# EAGLE board schematic_v0 (EAGLE 9.7.0)
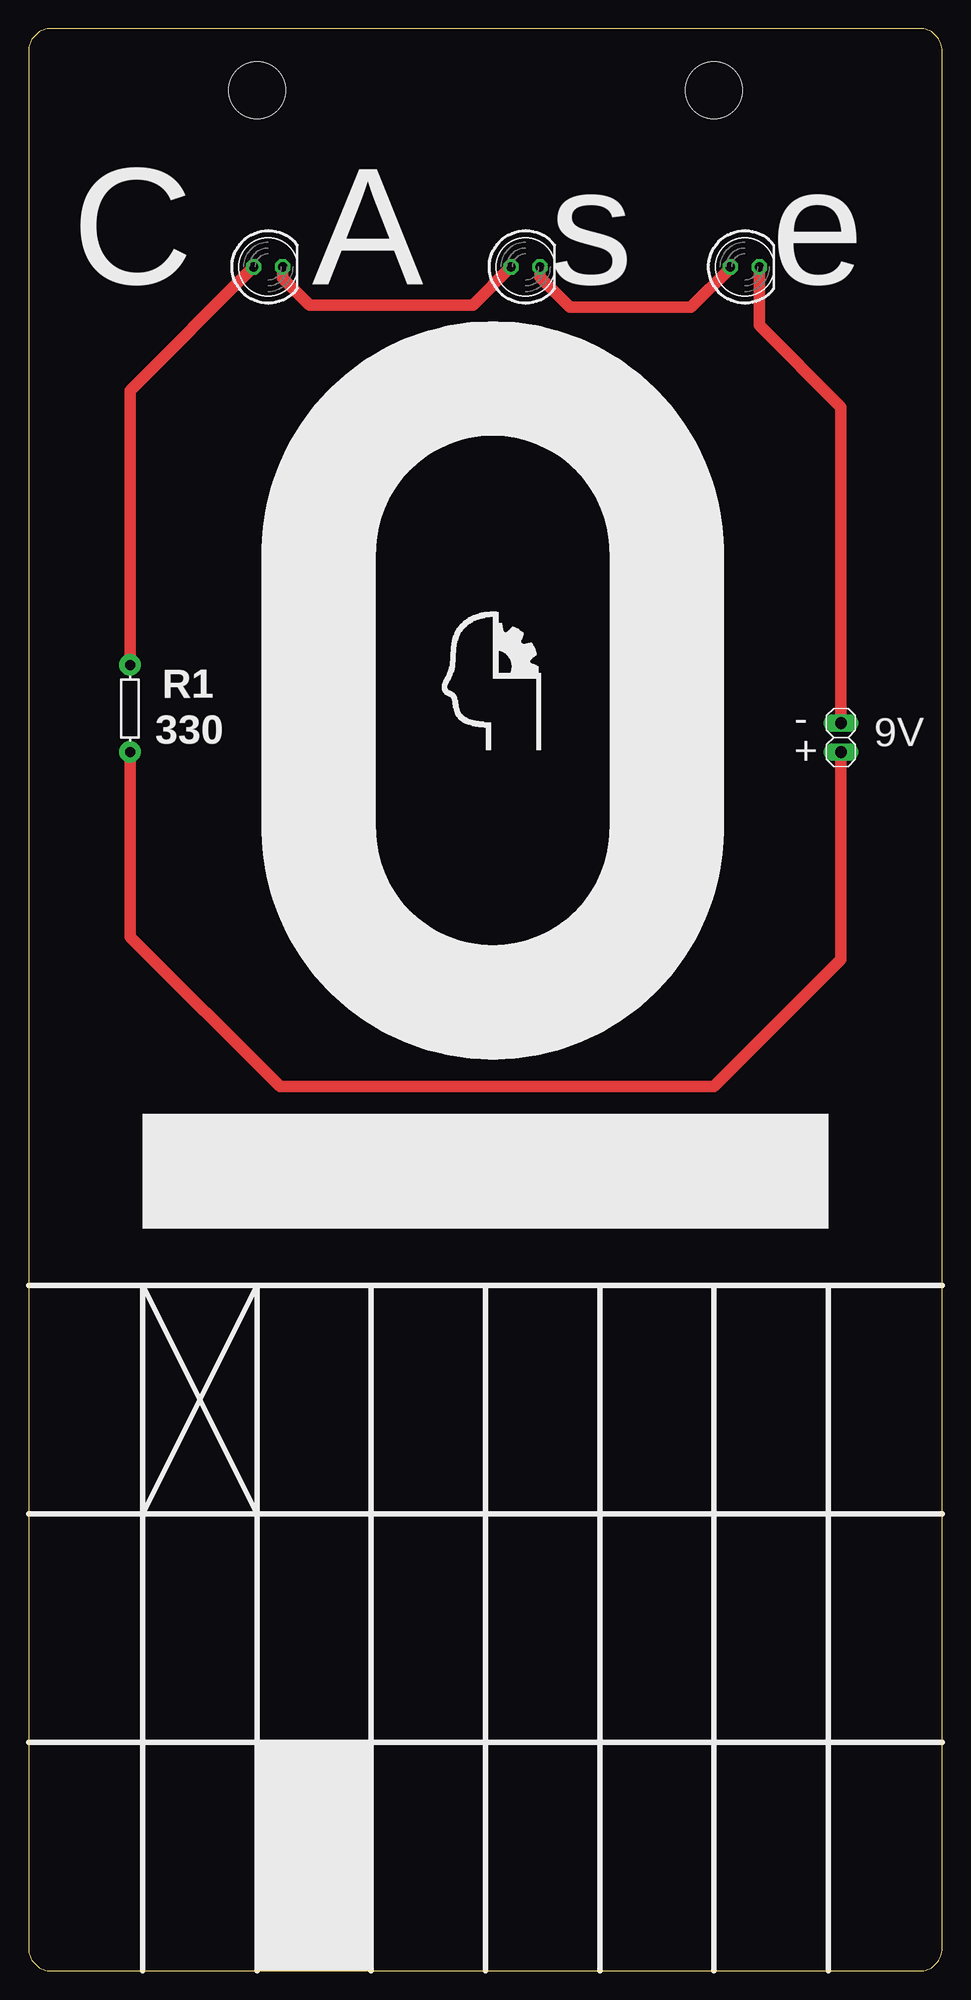
[diagram p0: board, top side]

Size 80 x 170 mm. Coordinates in mm from the lower left corner, seen from the top.
Outline: 80,2 80,168 arc90 78,170 2,170 arc90 0,168 0,2 arc90 2,0 78,0 arc90 80,2
Copper layers (1*16): Top 0.035mm / dielectric 1.5mm / Bottom 0.035mm
Design rules "default": minimum track width 6mil, minimum drill 0.35mm, track to track 6mil, track to pad 6mil, pad to pad 6mil, via to via 6mil, smd to smd 6mil, copper to edge 40mil, drill to drill 6mil, minimum pad ring 10mil, minimum via ring 8mil, stop-mask expansion 4mil, vias tented up to drill 0mil, thermal gap 10mil
Holes 5 mm at 20,164.6 60,164.6

## Footprints (pad centres in the part's own frame; a part is rotated, then mirrored left to right if it is on the bottom)
1X02 = drill 1.016 long: 1 -1.27,0; 2 1.27,0
LED5MM = drill 0.813 octagon: A -1.27,0; K 1.27,0
AXIAL-0.3 = drill 0.9 pad 1.88: P$1 -3.81,0; P$2 3.81,0

## Placement (x,y rotation side)
9VBAT  [1X02]  71.12,107.95 270 top
LED_1  5mm  [LED5MM]  20.98,149.14 0 top
LED_2  5mm  [LED5MM]  43.51,149.14 0 top
LED_3  5mm  [LED5MM]  62.7,149.14 0 top
R1  330  [AXIAL-0.3]  8.89,110.49 270 top

## Library data of the parts
9VBAT = CASE-Pinhead
LED_1-LED_3 = CASE-LED
R1 = SparkFun-Resistors; PROD_ID: RES-12182

## Nets
9V: 9VBAT.2 R1.P$2
GND: 9VBAT.1 LED_3.K
N$1: LED_1.A R1.P$1
N$2: LED_1.K LED_2.A
N$3: LED_2.K LED_3.A

## Tracks (layer width: path | path; a pad name or v marks a point on that pad's centre or on a via)
9V
  Top 1.016: 9VBAT.2 71.12,88.52 60,77.4 22,77.4 8.89,90.51 R1.P$2
GND
  Top 1.016: LED_3.K 63.97,144.03 71.12,136.88 9VBAT.1
N$1
  Top 1.016: R1.P$1 8.89,138.32 LED_1.A
N$2
  Top 1.016: LED_1.K 22.25,148.15 24.6,145.8 38.9,145.8 LED_2.A
N$3
  Top 1.016: LED_3.A 61.43,149.03 58,145.6 47.4,145.6 44.78,148.22 LED_2.K

## Text on the board
tPlace: C | A | s | e | - | 9V | +